# Altium PCB Tempature Sensor.PcbDoc
Units mil, origin at the board's own origin, x right, y up, seen from the top; angles counter-clockwise.
Board outline 1082.68 x 551.18 mil, 2 copper layers (Top Layer, Bottom Layer); 10 components, 7 nets, 28 pads, 0 vias.
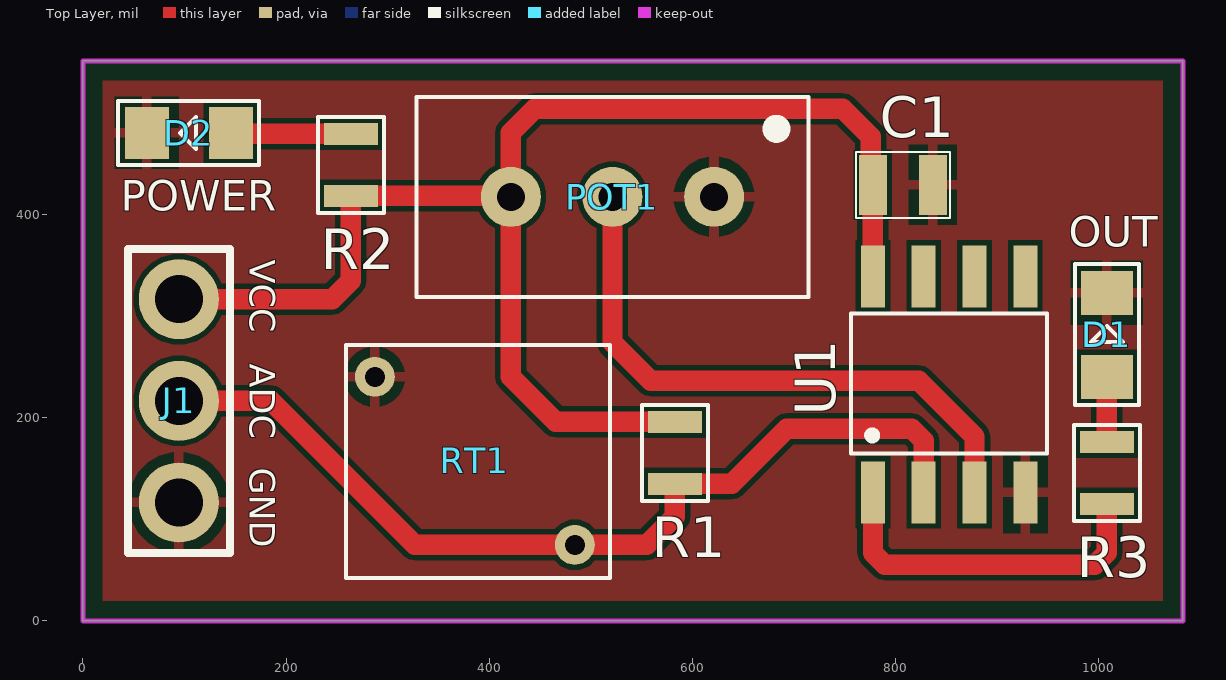
[diagram p0: Top Layer view]
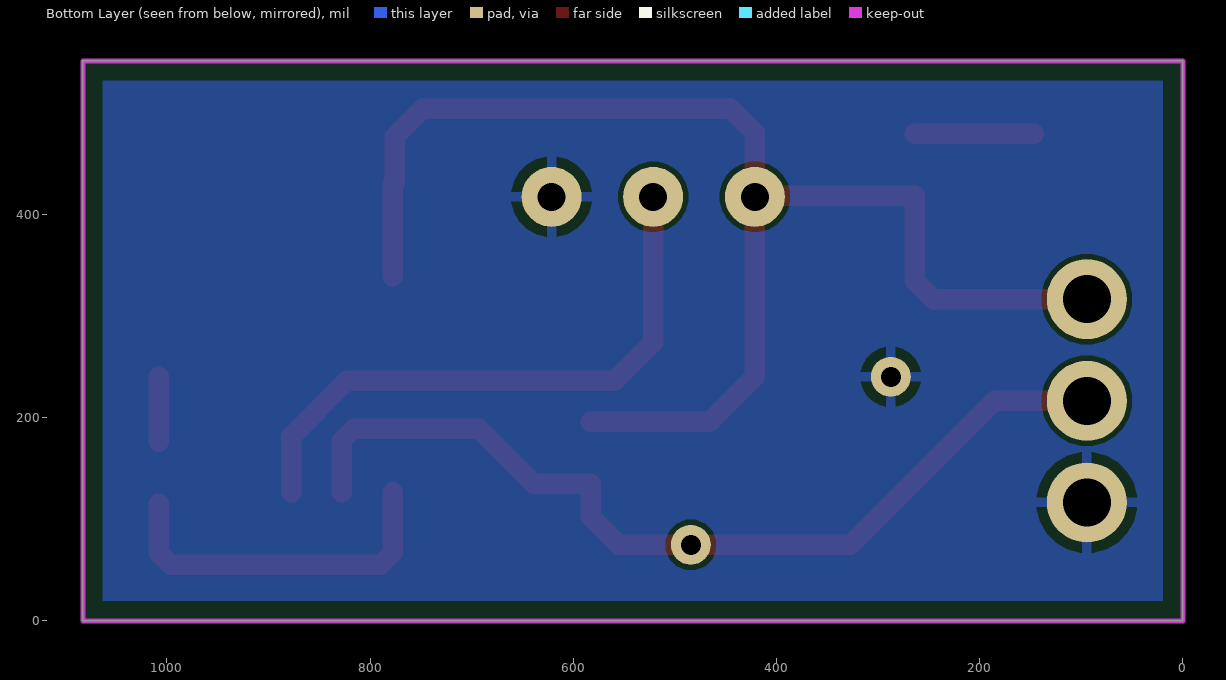
[diagram p1: Bottom Layer view, seen from below]
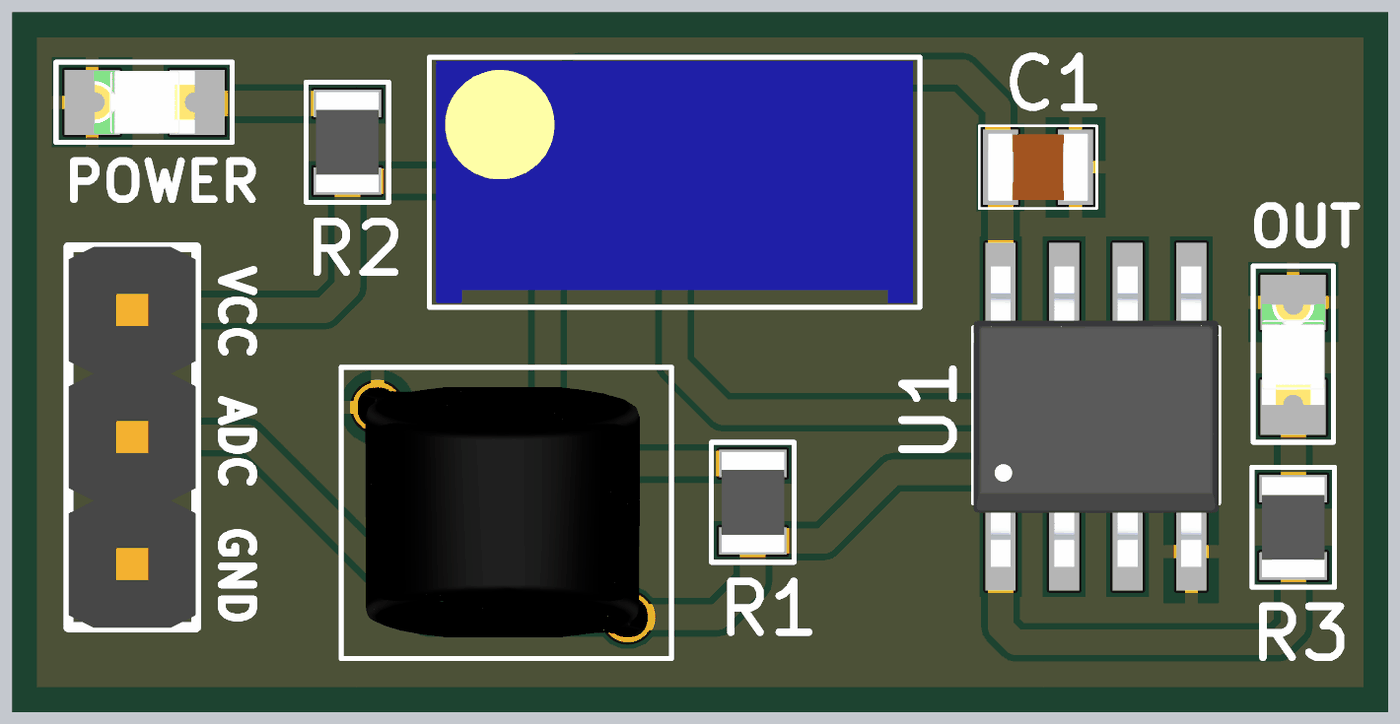
[diagram p2: 3D render of the assembled board from above, using the file's embedded part models]

## Layer stack, top to bottom
Top Solder: solder mask 0.4, Solder Resist, Dk 3.5
Top Layer: signal copper 1.4
Dielectric 1: dielectric 12.6, FR-4, Dk 4.8
Bottom Layer: signal copper 1.4
Bottom Solder: solder mask 0.4, Solder Resist, Dk 3.5

## Board outline
0,0 1082.68,0 1082.68,551.18 0,551.18

## Design rules (kind name [scope] priority, off if disabled: settings)
Clearance [All] p1: gap=5 ignorepadtopadclearanceinfootprint=FALSE except(0: Arc-Text Arc-Hole Track-Text Track-Hole SMDPad-Text SMDPad-Hole THPad-Text THPad-Hole Via-Text Via-Hole Fill-Text Fill-Hole Poly-Text Poly-Hole Region-Text Region-Hole Text-Text Text-Hole)
PolygonConnect [All] p1: connectstyle=Relief reliefconductorwidth=10 reliefentries=4 polygonreliefangle="90 Angle" airgapwidth=10
RoutingVias [All] p1: holewidth=34 width=17 viastyle="Through Hole" minholewidth=17 minwidth=34 maxholewidth=25 maxwidth=50
SolderMaskExpansion [All] p1: expansion=4 istentingtop=FALSE
Width [All] p1: maxlimit=50 minlimit=10 preferedwidth=20 minimp=50.000000 maximp=50.000000 favimp=50.000000
30 further rules are at their usual default settings.

## Components (designator, comment, footprint, x,y, rotation, side; value= is the part's Value field where it differs from the comment)
C1 "CC0805KRX7R9BB104" CAP_0805 807.09,429.13 r180 top value=0.1uF
D1 "150080RS75000" LED_0805 1007.78,281.63 r90 top (schematic designator LED1)
D2 "150080RS75000" LED_0805 104.19,480.23 r180 top (schematic designator LED2)
J1 "61300311121" HEADER 94.49,216.54 r90 top
POT1 "PV36W103C01B00" TRIMMER 521.26,417.32 r180 top value=10K
R1 "RC0805JR-0710KL" RES_0805 582.68,165.35 r90 top value=10K
R2 "RC0805JR-071KL" RES_0805 263.78,448.82 r270 top value=1K
R3 "RC0805JR-07220RL" RES_0805 1007.87,145.67 r90 top value=220R
RT1 "B57164K0103J000" NTC 385.83,157.48 r0 top value=10K
U1 "LM358S-13" SO-8 852.68,232.76 r0 top

## Footprints (in the part's own frame and the unit in brackets; to place one, negate y for a bottom-side part, rotate by r counter-clockwise, add the part's x,y. Pads: shape width x height; smd on the part's side, far side on the other; paste and mask are expansions set on the pad)
CAP_0805 [mm]
  rect 0.7x1.5 smd mask+0.05: 1(-0.75,0) 2(0.75,0)
  silkscreen extent -1.17,-0.82 1.17,0.82, body extent -1,-0.67 1,0.67, height 1.22
HEADER [mm]
  round 2 hole 1.2 mask+0.05: 1(-2.54,0) 2(0,0) 3(2.54,0)
  silkscreen extent -3.8,-1.28 3.8,1.28, body extent -3.81,-1.27 3.81,1.27, height 8.57
LED_0805 [mm]
  rect 1.1x1.3 smd mask+0.05: 1(-1.053,-0.002) 2(1.047,-0.002)
  silkscreen extent -1.75,-0.8 1.77,0.8, body extent -1,-0.63 1,0.62, height 0.7
NTC [mm]
  round 1 hole 0.5 mask+0.05: 1(-2.5,2.1) 2(2.5,-2.1)
  silkscreen extent -3.22,-2.93 3.37,2.9, body extent -2.9,-2.5 2.9,2.5, height 7.75
RES_0805 [mm]
  rect 0.55x1.35 smd mask+0.05: 1(-0.775,0) 2(0.775,0)
  silkscreen extent -1.2,-0.82 1.2,0.82, body extent -1,-0.63 1,0.63, height 0.6
SO-8 [mm]
  rect 0.6x1.55 smd mask+0.05: 1(-1.905,-2.7) 2(-0.635,-2.7) 3(0.635,-2.7) 4(1.905,-2.7) 5(1.905,2.7) 6(0.635,2.7) 7(-0.635,2.7) 8(-1.905,2.7)
  silkscreen extent -2.45,-1.73 2.45,1.78, body extent -2.45,-3 2.45,3, height 1.7
TRIMMER [mm]
  round 1.5 hole 0.7 mask+0.05: 1(-2.54,0) 2(0,0) 3(2.54,0)
  silkscreen extent -4.9,-2.5 4.9,2.5, body extent -4.76,-2.42 4.76,2.41, height 11.55

## Part data
C1: library part "CAP CER 0.1UF", "CAP CER 0.1UF 50V X7R 0805"
D1 D2: library part "LED SMD", "LED RED 0805 SMD"
J1: library part HEADER, "CONN HEADER 3POS 2.54MM"
POT1: library part "POT 10K", "TRIMMER 10K OHM 0.5W"
R1: library part "RES 10K OHM", "RES 10K OHM 5% 1/8W 0805"
R2: library part "RES 1K OHM", "RES 1K OHM 5% 1/8W 0805"
R3: library part "RES 220 OHM", "RES 220 OHM 5% 1/8W 0805"
RT1: library part NTC, "THERMISTOR NTC 10KOHM 4300K"
U1: library part OPAMP, "IC OPAMP GP 2 CIRCUIT 8SO"

## Nets (pads, with @x,y where several pads share a name; then routed paths per layer and width w, separated by ;. In a path a pad name is that pad's centre, name@x,y a point inside that pad or via, vN(x,y) a via of type N, cw(c..) or ccw(c..) an arc to the next point about the centre after c; other vN are vias at no path point)
ADC: J1.2 R1.1 RT1.2 U1.2 | length 913.9
  Top Layer w20: J1.2 185.04,216.54 326.77,74.8 RT1.2 555.12,74.8 582.68,102.36 R1.1 638.78,134.84 692.91,188.98 815.96,188.98 827.68,177.26 U1.2
GND: C1.1 D1.2 D2.2 J1.1 POT1.1 RT1.1 U1.4
NetLED1_1: D1.1 R3.2 | length 64
  Top Layer w20: R3.2 D1.1
NetLED2_1: D2.1 R2.1 | length 117.1
  Top Layer w20: D2.1@146.65,479.33 R2.1
NetPOT1_2: POT1.2 U1.3 | length 593
  Top Layer w20: POT1.2 521.26,274.02 559.06,236.22 822.83,236.22 877.68,181.38 U1.3
NetR3_1: R3.1 U1.1 | length 347.8
  Top Layer w20: U1.1 777.68,66.83 789.39,55.12 996.16,55.12 1007.87,66.83 R3.1
VCC: C1.2 J1.3 POT1.3 R1.2 R2.2 U1.8 | length 1350.6
  Top Layer w20: J1.3 245.67,316.54 263.78,334.65 R2.2 POT1.3@420.28,418.31 ; R1.2 465.55,195.87 421.26,240.16 POT1.3 421.26,480.31 444.88,503.94 748.03,503.94 775.59,476.38 775.59,431.1 C1.2 C1.2 777.62,339.11 U1.8
pads on no net: U1.5 U1.6 U1.7

## Polygon pours and split planes (outlines as drawn)
GND on Bottom Layer "GND_L02_P000" (solid, remove dead copper, pour order 0): 19.68,531.5 19.68,19.68 1062.99,19.68 1062.99,531.5
GND on Top Layer "GND_L01_P001" (solid, remove dead copper, pour order 1): 19.68,531.5 19.68,19.68 1062.99,19.68 1062.99,531.5

## Keep-outs
Keep-Out Layer:
  the board outline again, w5

## Silkscreen, mask and mechanical layers (free items; w line width, h text height)
Top Overlay:
  text "POWER" at 37.5,403.64 h30
  text "OUT" at 970.57,368.2 h30
  text "VCC" at 164.48,355.2 h25 r270
  text "ADC" at 164.48,252.84 h25 r270
  text "GND" at 164.48,150.48 h25 r270